# Altium PCB RUT_LCD_PCB.PcbDoc
Units mm, origin at the board's own origin, x right, y up, seen from the top; angles counter-clockwise.
Board outline 68.58 x 73.19 mm, 3 copper layers (Top Layer, Core, Bottom Layer), stack 2.582 mm thick; 25 components, 30 nets, 128 pads, 65 vias.
Unrouted connection lines stored in the file: 40.
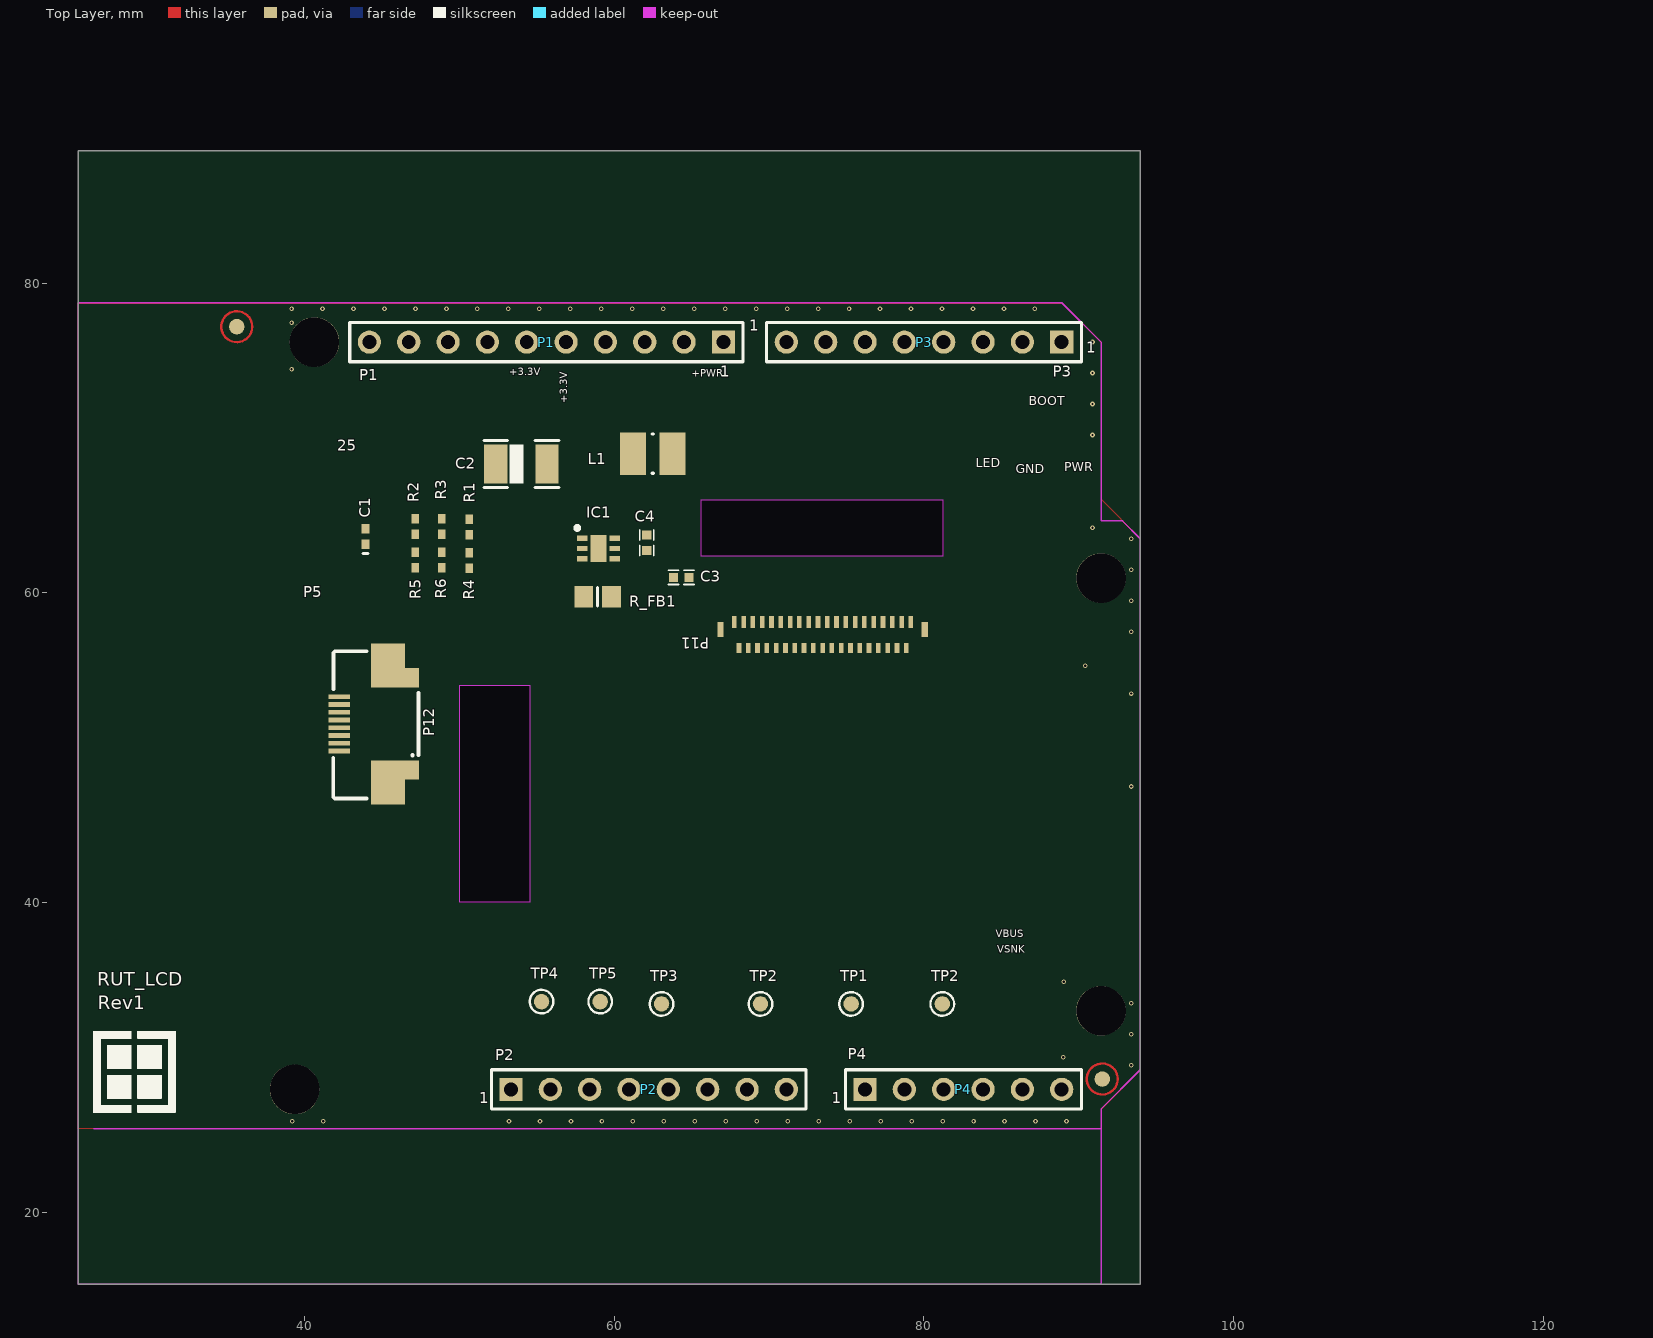
[diagram p0: Top Layer view]
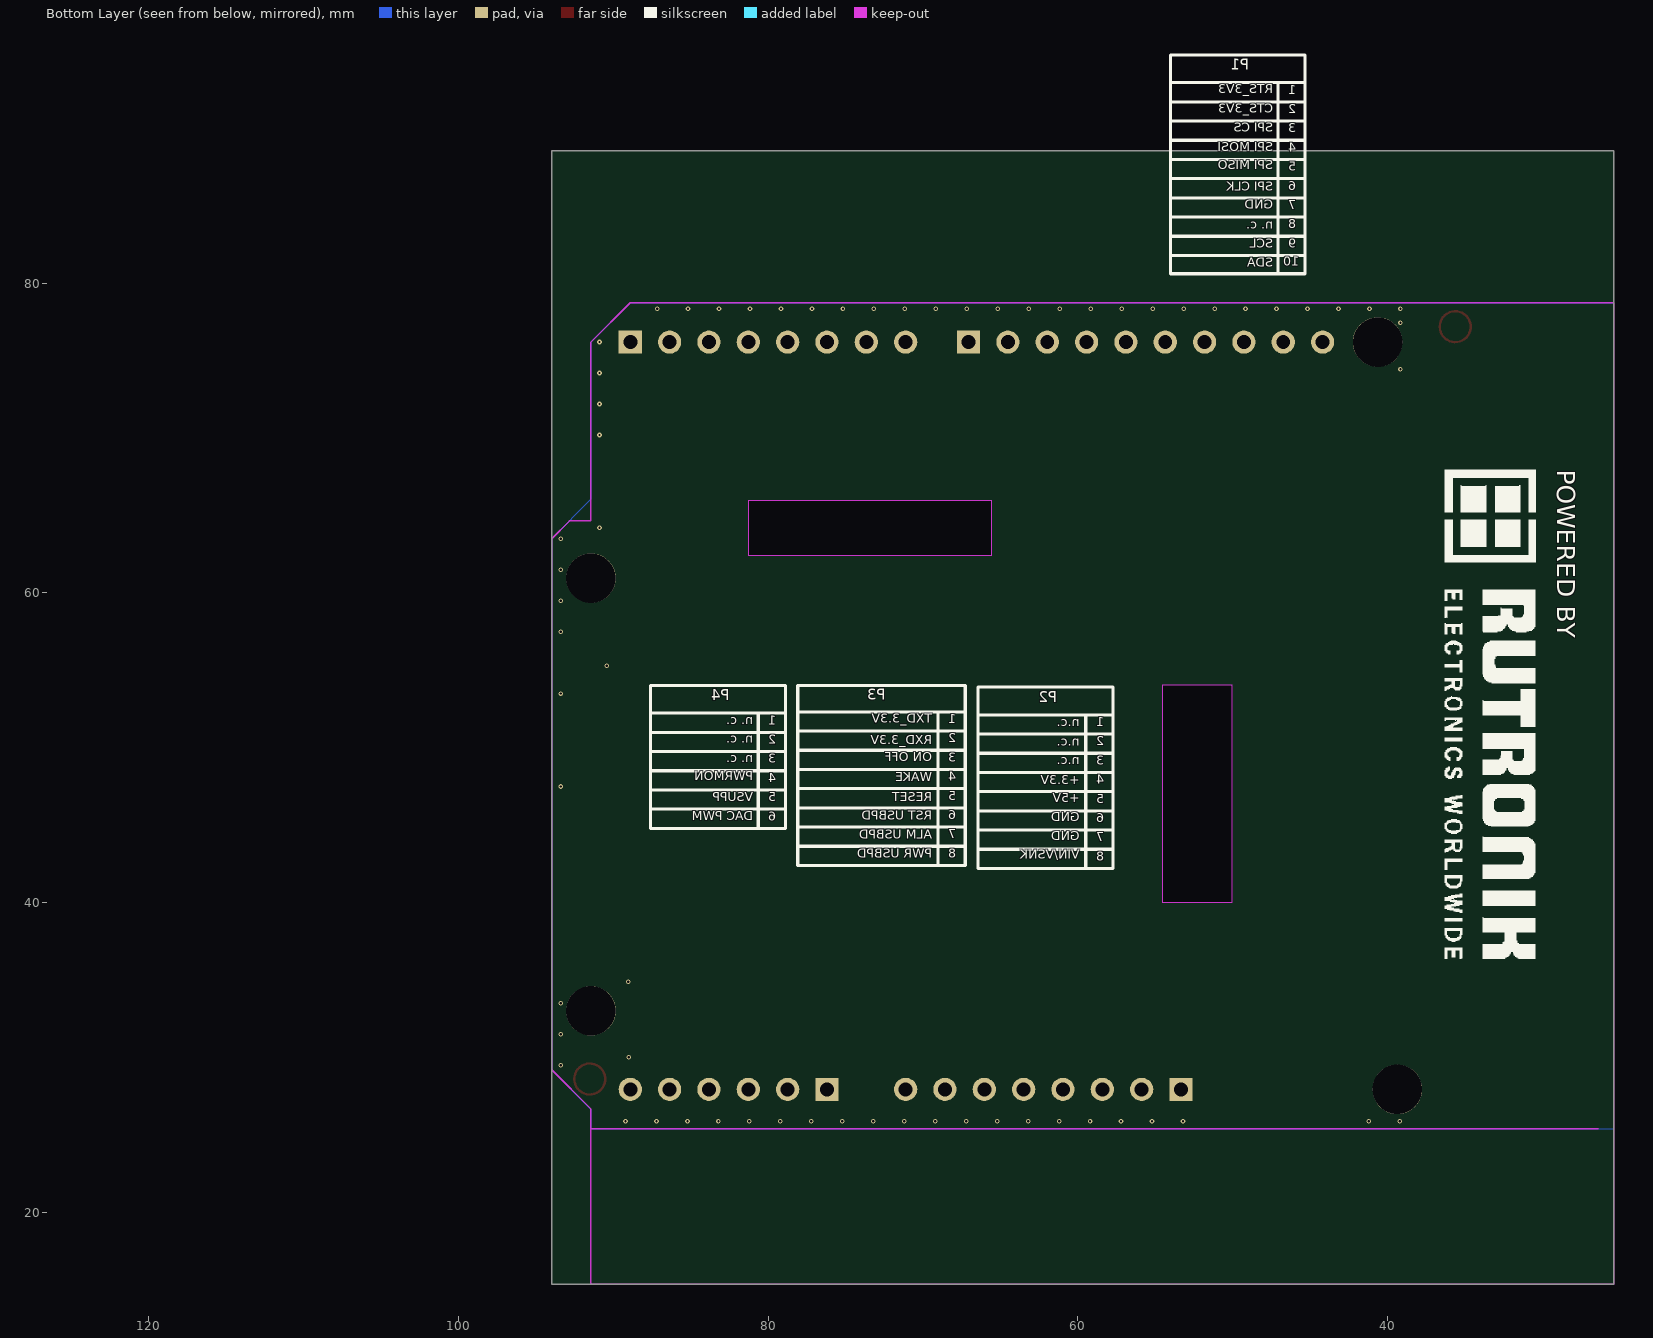
[diagram p1: Bottom Layer view, seen from below]

## Layer stack, top to bottom
Top Solder: solder mask 0.03, Solder Resist, Dk 3.5
Top Layer: signal copper 0.0356
Dielectric 1: prepreg 0.12, FR-4, Dk 4.2
Dielectric 3: core 1.2, FR-4, Dk 4.2
Dielectric 2: prepreg 0.12, FR-4, Dk 4.2
Core: signal copper 1
Dielectric 4: prepreg 0.0711, PP-006, Dk 4.1
Bottom Layer: signal copper 0.0356
Bottom Solder: solder mask 0.03, Solder Resist, Dk 3.5

## Board outline
25.4,15.36 93.98,15.36 93.98,88.55 25.4,88.55
cut-out: 54.55,54.03 54.55,40.02 50.02,40.02 50.02,54.03
cut-out: 81.25,62.41 81.25,65.98 65.6,65.98 65.6,62.41

## Design rules (kind name [scope] priority, off if disabled: settings)
Clearance [All] p1: gap=0.15 ignorepadtopadclearanceinfootprint=FALSE except(0.1: Via-Via)
DiffPairsRouting [All] p1: maxlimit=0.2 minlimit=0.15 mostfreqgap=0.15 toplayer_minwidth=0.2 toplayer_maxwidth=0.4 toplayer_prefwidth=0.25 midlayer1_minwidth=0.2 midlayer1_maxwidth=0.4 midlayer1_prefwidth=0.25 bottomlayer_minwidth=0.2 bottomlayer_maxwidth=0.4 bottomlayer_prefwidth=0.25 maxuncoupledlength=12.7
HoleSize [All] p1: absolutevalues=TRUE maxlimit=12 minlimit=0.025 maxpercent=80.000 minpercent=20.000
HoleToHoleClearance [All] p1: gap=0 allowstackedmicrovias=TRUE
MinimumSolderMaskSliver [All] p1: minsoldermaskwidth=0
PolygonConnect PolygonConnect_via [isvia] p1: connectstyle=Direct reliefconductorwidth=0.254 reliefentries=4 polygonreliefangle="90 Angle" airgapwidth=0.254
PolygonConnect [All] p2: connectstyle=Relief reliefconductorwidth=0.4 reliefentries=4 polygonreliefangle="90 Angle" airgapwidth=0.25
RoomDefinition LCD [InComponentClass('LCD')] p1: confinementstyle=ConfineIn formatcopy=TRUE lockcomponents=FALSE outline 5.76,17.97 266.159,17.97 266.159,89.93 5.76,89.93
RoutingVias [All] p1: holewidth=0.711 width=1.27 viastyle="Through Hole" minholewidth=0.15 minwidth=0.3 maxholewidth=0.96 maxwidth=1.27
SilkToSilkClearance [All] p1: silktosilkclearance=0
SilkToSolderMaskClearance [IsPad] p1: minsilkscreentomaskgap=0 clearancetoexposedcopper=TRUE
SolderMaskExpansion [All] p1: expansion=0.102
Width [All] p1: maxlimit=4 minlimit=0.15 preferedwidth=0.2
24 further rules are at their usual default settings.

## Components (designator, comment, footprint, x,y, rotation, side; value= is the part's Value field where it differs from the comment)
C1 "Cap Semi" 0402-A 43.94,63.64 r90 top value=100nF
C2 "Cap Semi" case-B 52.358,68.32 r0 top value=10uF
C3 "Cap Semi" C0402 64.33,61 r0 top value=1uF
C4 "Cap Semi" C0402 62.1,63.24 r270 top value=2.2uF
IC1 "AL3050FDC-7" SON65P200X200X61-7N 58.99,62.87 r0 bottom
L1 "" INDC3225X22N 62.49,68.99 r0 bottom value=22uH
P1 "DIGITAL 1" HDR1X10 67.056,76.2 r180 top locked value=PRT-11417
P2 "POWER" HDR1X8 53.34,27.94 r0 top locked
P3 "DIGITAL 2" HDR1X8 88.9,76.2 r180 top locked
P4 "ANALOG" HDR1X6 76.2,27.94 r0 top locked
P11 "P" FPC-39 72.56,57.64 r180 bottom
P12 "0528920833" "CONN FFC BOTTOM 8POS 0.50MM" 42.25,53.295 r90 bottom
R1 "Res2" 0402 50.64,64.25 r270 top value=NC
R2 "Res2" 0402 47.15,64.29 r90 top value=10K
R3 "Res2" 0402 48.87,64.29 r270 top value=10K
R4 "Res2" 0402 50.64,62.09 r270 top value=10K
R5 "Res2" 0402 47.15,62.12 r270 top value=NC
R6 "Res2" 0402 48.87,62.13 r90 top value=NC
R_FB1 "Res1" 6-0805_N 58.93,59.76 r0 top value=10R
TP1 "Ø1.0mm,SMD" TP_SMD_Ø1.0mm 75.3,33.46 r0 top
TP2 "Ø1.0mm,SMD" TP_SMD_Ø1.0mm 81.19,33.46 r90 top
TP2 "Ø1.0mm,SMD" TP_SMD_Ø1.0mm 69.45,33.46 r90 top
TP3 "Ø1.0mm,SMD" TP_SMD_Ø1.0mm 63.06,33.46 r90 top
TP4 "Ø1.0mm,SMD" TP_SMD_Ø1.0mm 55.31,33.61 r90 top
TP5 "Ø1.0mm,SMD" TP_SMD_Ø1.0mm 59.1,33.61 r90 top

## Footprints (in the part's own frame and the unit in brackets; to place one, negate y for a bottom-side part, rotate by r counter-clockwise, add the part's x,y. Pads: shape width x height; smd on the part's side, far side on the other; paste and mask are expansions set on the pad)
6-0805_N [mm] "Chip Resistor, Body 2.0x1.2mm, IPC Medium Density"
  rect 1.2x1.4 smd: 1(-0.9,0) 2(0.9,0)
  silkscreen extent 0,-0.6 0,0.6, body extent -1.07,-0.7 1.07,0.7, height 0.7
0402 [mm] "Chip Capacitor, Body 1.0x0.5mm, IPC High Density"
  rect 0.6x0.5 smd: 1(-0.5,0) 2(0.5,0)
  body extent -0.55,-0.3 0.55,0.3, height 1.3
0402-A [mm] "Chip Inductor, Body 1.0x0.5mm, IPC High Density"
  rect 0.6x0.5 smd: 1(-0.5,0) 2(0.5,0)
  silkscreen extent -1.1,-0.15 -1.1,0.15, body extent -0.55,-0.3 0.55,0.3, height 0.55
C0402 [mm] "Chip Capacitor, 2-Leads, Body 1,0x0,5mm, IPC High Density"
  rect 0.6x0.6 smd: 1(-0.5,0) 2(0.5,0)
  silkscreen extent -0.84,-0.46 0.84,0.46, body extent -0.5,-0.3 0.5,0.3, height 0.2
case-B [mm] "Tantalum capacitors standart case B"
  rect 1.5x2.5 smd: 1(0,0) 2(3.302,0)
  silkscreen extent -0.76,-1.52 4.06,1.52, body extent -0.19,-1.4 3.5,1.42, height 2.14
"CONN FFC BOTTOM 8POS 0.50MM" [mm]
  rect 0.3x1.4 smd far side: 1(-3.5,0) 2(-3,0) 3(-2.5,0) 4(-2,0) 5(-1.5,0) 6(-1,0) 7(-0.5,0) 8(0,0)
  rect 1.6x2.2 smd far side: ""(-6.15,3.15) ""(2.65,3.15)
  rect 1.25x3.1 smd far side: ""(-4.725,3.6) ""(1.225,3.6)
  body extent -6.48,-1.5 9.6,5.1, height 2
FPC-39 [mm] "0.30mm Pitch, Right-Angle, Bottom Contact, 0.95mm Height, 39 Circuits, Gold over Nickel Plating"
  rect 0.3x0.8 smd far side: 1(-6.6,0.48) 3(-6,0.48) 5(-5.4,0.48) 7(-4.8,0.48) 9(-4.2,0.48) 11(-3.6,0.48) 13(-3,0.48) 15(-2.4,0.48) 17(-1.8,0.48) 19(-1.2,0.48) 21(-0.6,0.48) 23(0,0.48) 25(0.6,0.48) 27(1.2,0.48) 29(1.8,0.48) 31(2.4,0.48) 33(3,0.48) 35(3.6,0.48) 37(4.2,0.48) 39(4.8,0.48)
  rect 0.3x0.65 smd far side: 2(-6.3,-1.21) 4(-5.7,-1.21) 6(-5.1,-1.21) 8(-4.5,-1.21) 10(-3.9,-1.21) 12(-3.3,-1.21) 14(-2.7,-1.21) 16(-2.1,-1.21) 18(-1.5,-1.21) 20(-0.9,-1.21) 22(-0.3,-1.21) 24(0.3,-1.21) 26(0.9,-1.21) 28(1.5,-1.21) 30(2.1,-1.21) 32(2.7,-1.21) 34(3.3,-1.21) 36(3.9,-1.21) 38(4.5,-1.21)
  rect 0.4x0.95 smd far side: ""(-7.5,0) ""(5.7,0)
  body extent -7.57,-1.76 5.78,1.09, height 0.94
HDR1X6 [mm] "Connector; Header; 6 Position"
  rect 1.5x1.5 hole 0.9: 1(0,0)
  round 1.5 hole 0.9: 2(2.54,0) 3(5.08,0) 4(7.62,0) 5(10.16,0) 6(12.7,0)
  silkscreen extent -1.27,-1.27 13.97,1.27, body extent -1.27,-1.27 13.97,1.27, height 8.5
HDR1X8 [mm] "Connector; Header; 8 Position"
  rect 1.5x1.5 hole 0.9: 1(0,0)
  round 1.5 hole 0.9: 2(2.54,0) 3(5.08,0) 4(7.62,0) 5(10.16,0) 6(12.7,0) 7(15.24,0) 8(17.78,0)
  silkscreen extent -1.27,-1.27 19.05,1.27, body extent -1.27,-1.27 19.05,1.27, height 8.5
HDR1X10 [mm] "Connector; Header; 10 Position"
  rect 1.5x1.5 hole 0.9: 1(0,0)
  round 1.5 hole 0.9: 2(2.54,0) 3(5.08,0) 4(7.62,0) 5(10.16,0) 6(12.7,0) 7(15.24,0) 8(17.78,0) 9(20.32,0) 10(22.86,0)
  silkscreen extent -1.27,-1.27 24.13,1.27, body extent -1.27,-1.27 24.13,1.27, height 8.5
INDC3225X22N [mm] "Chip Inductor, 2-Leads, Body 3.20x2.50mm, IPC Medium Density"
  rect 1.67x2.72 smd far side: 1(-1.27,0) 2(1.27,0)
  body extent -1.75,-1.35 1.75,1.35, height 2.2
SON65P200X200X61-7N [mm]
  rect 0.65x0.35 smd far side: 1(-1.05,-0.65) 2(-1.05,0) 3(-1.05,0.65) 4(1.05,0.65) 5(1.05,0) 6(1.05,-0.65)
  rect 1.06x1.75 smd far side: 7(0,0)
  body extent -1.05,-1 1.05,1, height 0.61
TP_SMD_Ø1.0mm [mm]
  round 1 smd paste-5: 1(0,0)
  silkscreen extent -0.76,-0.76 0.76,0.76

## Part data
C1: "Capacitor (Semiconductor SIM Model)", Manufacturer=YAGEO, Manufacturer Part No.=CC0402KRX7R9BB104, Supplier part number=KKK23619, Link=https://www.rutronik24.com/search-result/qs:KKK23619/reset:0, Part Description="Ceramic Capacitor", Specification="X7R, 50V, 10%", Supplier=Rutronik
C2: "Capacitor (Semiconductor SIM Model)", Manufacturer="Samsung Electronics", Manufacturer Part No.=CL05A106MP5NUNC, Supplier part number=KKS2857, Link=https://www.rutronik24.com/search-result/qs:KKS2857/reset:0, Part Description="Ceramic Capacitor", Specification="X5R, 10V, 20%", Supplier=Rutronik
C3 C4: "Capacitor (Semiconductor SIM Model)", Manufacturer=muRata, Manufacturer Part No.=GRM155R61E105KA12D, Supplier part number=KKS4987, Link=https://www.rutronik24.com/product/murata/grm155r61e105ka12d/4725132.html, Part Description="Ceramic Capacitor", Specification="X5R, 25V, 10%", Supplier=Rutronik
IC1: "Integrated Circuit", Manufacturer_Name="Diodes Inc.", Mouser Part Number=621-AL3050FDC-7, Datasheet Link=https://www.diodes.com/search/?q=AL3050&t=keyword&action_results=Go, Height=0.61mm, Manufacturer_Part_Number=AL3050FDC-7, Mouser Price/Stock=https://www.mouser.com/Search/Refine.aspx?Keyword=621-AL3050FDC-7
L1: library part Inductor, "Inductor", Code_IEC=1005, Code_JEITA=0402, LatestRevisionDate=29-May-2009, LatestRevisionNote="IPC-7351 Footprint Added.", PackageDescription="Chip Inductor", PackageReference=0402-A, Published=8-Jun-2000, Publisher="Altium Limited"
P1: library part "Header 10", Manufacturer="SparkFun Electronics", Manufacturer Part No.=PRT-11417, Supplier part number=1568-1413-ND, Link=https://www.digikey.com/products/en?keywords=1568-1413-ND, Part Description="Arduino Stackable Header Kit", Specification="10 pos. 2,54mm", Supplier=Digi-Key
P2 P3: library part "Header 8", Part Description="Arduino Connector", Specification="8 pos. 2,54mm", Supplier=Rutronik
P4: library part "Header 6", Part Description="Arduino Connector", Specification="6 pos. 2,54mm", Supplier=Rutronik
P12: "CONN FFC BOTTOM 8POS 0.50MM R/A", Current Rating=500mA, Flammability Rating="UL94 V-0", Manufacturer=Molex, Max Operating Temperature=85°C, Min Operating Temperature=-40°C, Package Quantity=1000, Supplier Part Number 1=WM11082CT-ND, Voltage Rating=50V, Actuator Material=Glass,Polyphenylene, ComponentLink1Description=https://datasheet.ciiva.com/29758/528923033-sd-29758739.pdf?src-supplier=Digi-Key, ComponentLink1URL=https://datasheet.ciiva.com/29758/528923033-sd-29758739.pdf?src-supplier=Digi-Key, ComponentLink2Description=https://datasheet.ciiva.com/46637/528922433-sd-46637399.pdf?src-supplier=Digi-Key, ComponentLink2URL=https://datasheet.ciiva.com/46637/528922433-sd-46637399.pdf?src-supplier=Digi-Key, Contact Material=Bronze, Contact Plating=Tin, Housing Material=Nylon, Manufacturer Part Number=0528920833, Mount="Surface Mount", Number of Contacts=8, Number of Positions=8, Number of Rows=1, Orientation="Right Angle", Packaging="Tape and Reel", Pitch=0.02inch, Pricing 1="1 = 0.89000, 10 = 0.77800, 25 = 0.73280, 50 = 0.70200, 100 = 0.67160, 250 = 0.61052, 500 = 0.54946 (USD)", Radiation Hardening=No, RoHS=Yes, Stock 1=5457, Supplier 1=Digi-Key, Termination=Solder, Wire/Cable Type=Straight
R1 R2 R3 R4 R5 R6: Manufacturer=ASJ, Manufacturer Part No.=CR10-103-JK, Supplier part number=WRC40976, Link=https://www.rutronik24.com/product/asj/cr10-103-jk/54295.html, Part Description="Thick Film Resistor", Specification="5% 0,063W", Supplier=Rutronik
R_FB1: "Resistor", LatestRevisionDate=17-Jul-2002, LatestRevisionNote="Re-released for DXP Platform.", PackageDescription="Axial Device, Thru-Hole; 2 Leads; 0.3 in Pin Spacing", PackageReference=AXIAL-0.3, Published=8-Jun-2000, Publisher="Altium Limited"
TP1 TP2 TP2 TP3 TP4 TP5: library part TP_SMD_Ø1.0MM, "1.0mm circular SMD testpad", Manufacturer="Nordic Semiconductor", Part number IPS=N.A., Artikkelnr Noca=N.A., ComponentLink1Description=Datasheet, ComponentLink2Description="Supplier link", Footprint Doc=TP_SMD_Ø1.0mm, LatestRevisionDate=2013-06-11, Part Number=TP_SMD_Ø1.0MM, Pin Count=1, Published=2013-06-11, Publisher="Nordic Semiconductor"

## Free pads (board coordinates)
  round 1 smd paste-1 mask+0.4: ""(35.63,77.19) ""(91.52,28.61)
  round 3.2 hole 3.2 unplated: ""(39.37,27.94) ""(40.64,76.2) ""(91.44,33.02) ""(91.44,60.96)

## Via types
v1: diameter 0.3, hole 0.15, Top Layer to Bottom Layer, tented both sides, 65 vias

## Nets (pads, with @x,y where several pads share a name; then routed paths per layer and width w, separated by ;. In a path a pad name is that pad's centre, name@x,y a point inside that pad or via, vN(x,y) a via of type N, cw(c..) or ccw(c..) an arc to the next point about the centre after c; other vN are vias at no path point)
3V3: C1.2 C2.2 P11.3 P11.38 R1.1 R2.1 R3.1 TP2.1@81.19,33.46
3V3_AUX: C4.1 IC1.2 L1.1 P2.4
5V_AUX: P2.5
ENABLE: P1.1 P11.28 | length 0
  Top Layer w0.15: P1.1@67.03,76.174 P1.1
GND: C1.1 C2.1 C3.2 C4.2 IC1.5 IC1.7 P1.7 P2.6 P2.7 P11.6 P11.7 P11.8 P11.9 P11.10 P11.11 P11.12 P11.13 P11.14 P11.15 P11.16 P11.17 P11.18 P11.19 P11.20 P11.21 P11.22 P11.23 P11.24 P11.25 P11.27 P12.1 P12.8 R4.2 R5.2 R6.1 R_FB1.1
  other v1: 39.21,25.88 41.21,25.88 53.21,25.88 55.21,25.88 57.21,25.88 59.21,25.88 61.21,25.88 63.21,25.88 65.21,25.88 67.21,25.88 69.21,25.88 71.21,25.88 73.21,25.88 75.21,25.88 77.21,25.88 79.21,25.88 81.21,25.88 83.21,25.88 85.21,25.88 87.21,25.88 89.21,25.88 93.39,29.5 89,30.01 93.39,31.5 93.39,33.5 89.04,34.89 93.39,47.5 93.39,53.5 90.42,55.3 93.39,57.5 93.39,59.5 93.39,61.5 93.39,63.5 90.89,64.2 90.89,70.2 90.89,74.2 39.17,74.44 90.89,76.2 39.17,77.44 39.17,78.34 41.17,78.34 43.17,78.34 45.17,78.34 47.17,78.34 49.17,78.34 51.17,78.34 53.17,78.34 55.17,78.34 57.17,78.34 59.17,78.34 61.17,78.34 63.17,78.34 65.17,78.34 67.17,78.34 69.17,78.34 71.17,78.34 73.17,78.34 75.17,78.34 77.17,78.34 79.17,78.34 81.17,78.34 83.17,78.34 85.17,78.34 87.17,78.34
KEY1: P3.8 P12.2
KEY2: P3.7 P12.3
KEY3: P3.6 P12.4
KEY4: P3.5 P12.5
KEY5: P3.4 P12.6
LED_A: C3.1 IC1.3 P11.1
LED_CTRL: IC1.1 P3.3
LED_K: IC1.4 P11.2 R_FB1.2
NetIC1_6: IC1.6 L1.2
NetP11_26: P11.26 TP1.1
NetP11_29: P11.29 TP2.1@69.45,33.46
NetP11_30: P11.30 TP3.1
NetP11_31: P11.31 TP4.1
NetP11_32: P11.32 TP5.1
NetP11_36: P11.36 R1.2 R4.1
NetP11_37: P11.37 R3.2 R6.2
NetP11_39: P11.39 R5.1
RESET: P1.2 P11.35 | length 0
  Top Layer w0.3: P1.2@64.49,76.174 P1.2
RS: P11.33
SPI_CLK: P1.6
SPI_CS: P1.3 P11.34
SPI_MISO: P1.5 P11.4
SPI_MOSI: P1.4
TE: P3.1 P11.5
VSNK: P2.8
pads on no net: P1.8 P1.9 P1.10 P2.1 P2.2 P2.3 P3.2 P4.1 P4.2 P4.3 P4.4 P4.5 P4.6 P11. P12. P12.7 R2.2
copper on no net: | length 13
  Top Layer w0.15: 36.63,77.19 ccw(c35.63,77.19) 36.63,77.19 ; 92.52,28.61 ccw(c91.52,28.61) 92.52,28.61
  Top Layer w0.3: 83.82,27.94 83.82,28.101 ; 86.36,27.94 86.36,28.177
  other v1: 90.89,72.2

## Polygon pours and split planes (outlines as drawn)
GND on Bottom Layer "Bottom Layer-GND" (solid, remove dead copper, shelved, pour order 4): 25.4,25.4 25.4,78.7 88.9,78.7 88.9,78.74 91.44,76.2 91.44,66.04 93.98,63.5 93.98,29.21 91.44,26.67 91.44,25.4
GND on Top Layer "Top Layer-GND" (solid, remove dead copper, shelved, pour order 6): 25.4,25.4 25.4,78.7 88.9,78.7 88.9,78.74 91.44,76.2 91.44,66.04 93.98,63.5 93.98,29.21 91.44,26.67 91.44,25.4

## Keep-outs
Keep-Out Layer:
  lines w0.1: 26.4,25.4 91.44,25.4 ; 27.4,25.4 91.44,25.4 ; 28.4,25.4 91.44,25.4 ; 25.4,15.36 25.4,78.74 88.9,78.74 91.44,76.2 91.44,64.65 92.83,64.65 93.98,63.5 93.98,29.21 91.44,26.67 91.44,15.36 25.4,15.36

## Other copper
Top Layer:
  pour cut-out: 64.516,77.108
  pour cut-out: 64.57,77.07
  pour cut-out: 25.31,54.69
  pour cut-out: 124.633,62.492
  pour cut-out: 115.64,90.27
  pour cut-out: 115.501,90.439

## Silkscreen, mask and mechanical layers (free items; w line width, h text height)
Top Overlay:
  drawing of 6 lines, arcs and shapes, not listed
  text "1" at 68.71,76.67 h1.2
  text "1" at 90.49,75.236 h1.2
  text "+3.3V" at 53.21,73.91 h0.8
  text "+PWR" at 65.01,73.81 h0.8
  text "1" at 66.85,73.7 h1.2
  text "P3" at 88.32,73.71 h1.2
  text "P1" at 43.53,73.48 h1.2
  text "+3.3V" at 57.13,72.25 h0.8 r90
  text "BOOT" at 86.77,71.94 h1
  text "25" at 42.12,68.93 h1.2
  text "LED" at 83.36,67.93 h1
  text "PWR" at 89.06,67.66 h1
  text "GND" at 85.92,67.55 h1
  text "P5" at 39.91,59.47 h1.2
  text "VBUS" at 84.657,37.62 h0.8
  text "VSNK" at 84.74,36.59 h0.8
  text "RUT_LCD" at 26.61,34.35 h1.5
  text "Rev1" at 26.64,32.83 h1.5
  text "P4" at 75.1,29.62 h1.2
  text "P2" at 52.32,29.58 h1.2
  text "1" at 74.05,26.8 h1.2
  text "1" at 51.28,26.78 h1.2
Bottom Overlay:
  drawing of 174 lines, arcs and shapes, not listed
  text "P1" at 48.92,93.51 h1.2
  text "RTS_3V3" at 47.37,92.06 h1
  text "1" at 45.89,92.02 h1
  text "CTS_3V3" at 47.37,90.82 h1
  text "2" at 45.89,90.78 h1
  text "SPI CS" at 47.37,89.58 h1
  text "3" at 45.89,89.54 h1
  text "SPI MOSI" at 47.37,88.33 h1
  text "4" at 45.89,88.3 h1
  text "SPI MISO" at 47.37,87.16 h1
  text "5" at 45.89,87.06 h1
  text "6" at 45.89,85.82 h1
  text "SPI CLK" at 47.37,85.79 h1
  text "GND" at 47.37,84.63 h1
  text "7" at 45.89,84.58 h1
  text "8" at 45.89,83.34 h1
  text "n. c." at 47.37,83.33 h1
  text "SCL" at 47.37,82.11 h1
  text "9" at 45.89,82.1 h1
  text "10" at 45.71,80.93 h1
  text "SDA" at 47.37,80.88 h1
  text "POWERED BY" at 29.43,67.96 h2 r90
  text "P3" at 72.42,52.84 h1.2
  text "P4" at 82.49,52.8 h1.2
  text "P2" at 61.34,52.69 h1.2
  text "TXD_3.3V" at 69.39,51.41 h1
  text "1" at 67.84,51.39 h1
  text "n. c." at 80.96,51.34 h1
  text "1" at 79.46,51.31 h1
  text "1" at 58.31,51.2 h1
  text "n.c." at 59.87,51.21 h1
  text "2" at 67.84,50.15 h1
  text "n. c." at 80.96,50.13 h1
  text "2" at 79.46,50.07 h1
  text "RXD_3.3V" at 69.39,50.05 h1
  text "2" at 58.31,49.96 h1
  text "n.c." at 59.87,49.94 h1
  text "ON OFF" at 69.39,48.95 h1
  text "3" at 67.84,48.91 h1
  text "n. c." at 80.96,48.88 h1
  text "3" at 79.46,48.83 h1
  text "n.c." at 59.87,48.75 h1
  text "3" at 58.31,48.72 h1
  text "PWRMON" at 80.96,47.7 h1
  text "4" at 67.84,47.67 h1
  text "WAKE" at 69.39,47.66 h1
  text "4" at 79.46,47.59 h1
  text "4" at 58.31,47.48 h1
  text "+3.3V" at 59.87,47.46 h1
  text "5" at 67.84,46.43 h1
  text "RESET" at 69.39,46.37 h1
  text "5" at 79.46,46.35 h1
  text "VSUPP" at 80.96,46.34 h1
  text "+5V" at 59.87,46.29 h1
  text "5" at 58.31,46.24 h1
  text "6" at 67.84,45.19 h1
  text "RST USBPD" at 69.39,45.16 h1
  text "6" at 79.46,45.11 h1
  text "DAC PWM" at 80.96,45.12 h1
  text "GND" at 59.87,45.06 h1
  text "6" at 58.31,45 h1
  text "7" at 67.84,43.95 h1
  text "ALM USBPD" at 69.39,43.94 h1
  text "GND" at 59.87,43.83 h1
  text "7" at 58.31,43.76 h1
  text "8" at 67.84,42.71 h1
  text "PWR USBPD" at 69.39,42.69 h1
  text "VIN/VSNK" at 59.87,42.64 h1
  text "8" at 58.31,42.52 h1
Top Solder:
  region: 202.82,70.545
Mechanical 1:
  circle w0.254: c40.64,76.2 r2.8
  circle w0.254: c91.44,60.96 r2.8
  circle w0.254: c91.44,33.02 r2.8
  circle w0.254: c39.37,27.94 r2.8
  lines w0.1: 52.705,27.94 53.975,27.94 ; 53.34,27.305 53.34,28.575 ; 66.421,76.2 67.691,76.2 ; 67.056,75.565 67.056,76.835 ; 75.565,27.94 76.835,27.94 ; 76.2,27.305 76.2,28.575 ; 88.265,76.2 89.535,76.2 ; 88.9,75.565 88.9,76.835
  lines w0.254: 91.44,76.2 91.44,88.55 ; 91.44,88.55 93.98,88.55 93.98,15.36 91.44,15.36 25.4,15.36 25.4,78.74 25.4,88.55 91.44,88.55 ; 50.02,40.02 50.02,54.03 54.55,54.03 54.55,40.02 50.02,40.02 ; 65.6,62.41 65.6,65.98 81.25,65.98 81.25,62.41 65.6,62.41
  lines w1.2: 25.4,15.36 25.4,88.55 93.98,88.55 93.98,15.36 25.4,15.36

## Dimensions
91.44,25.4 to 93.98,15.36 on Mechanical 1
90.17,74.93 to 80.17,72.06 on Mechanical 1